# Altium PCB PCB2.PcbDoc
Units mil, origin at the board's own origin, x right, y up, seen from the top; angles counter-clockwise.
Board outline 1040 x 1325 mil, 2 copper layers (Top Layer, Bottom Layer); 6 components, 13 nets, 32 pads, 0 vias.
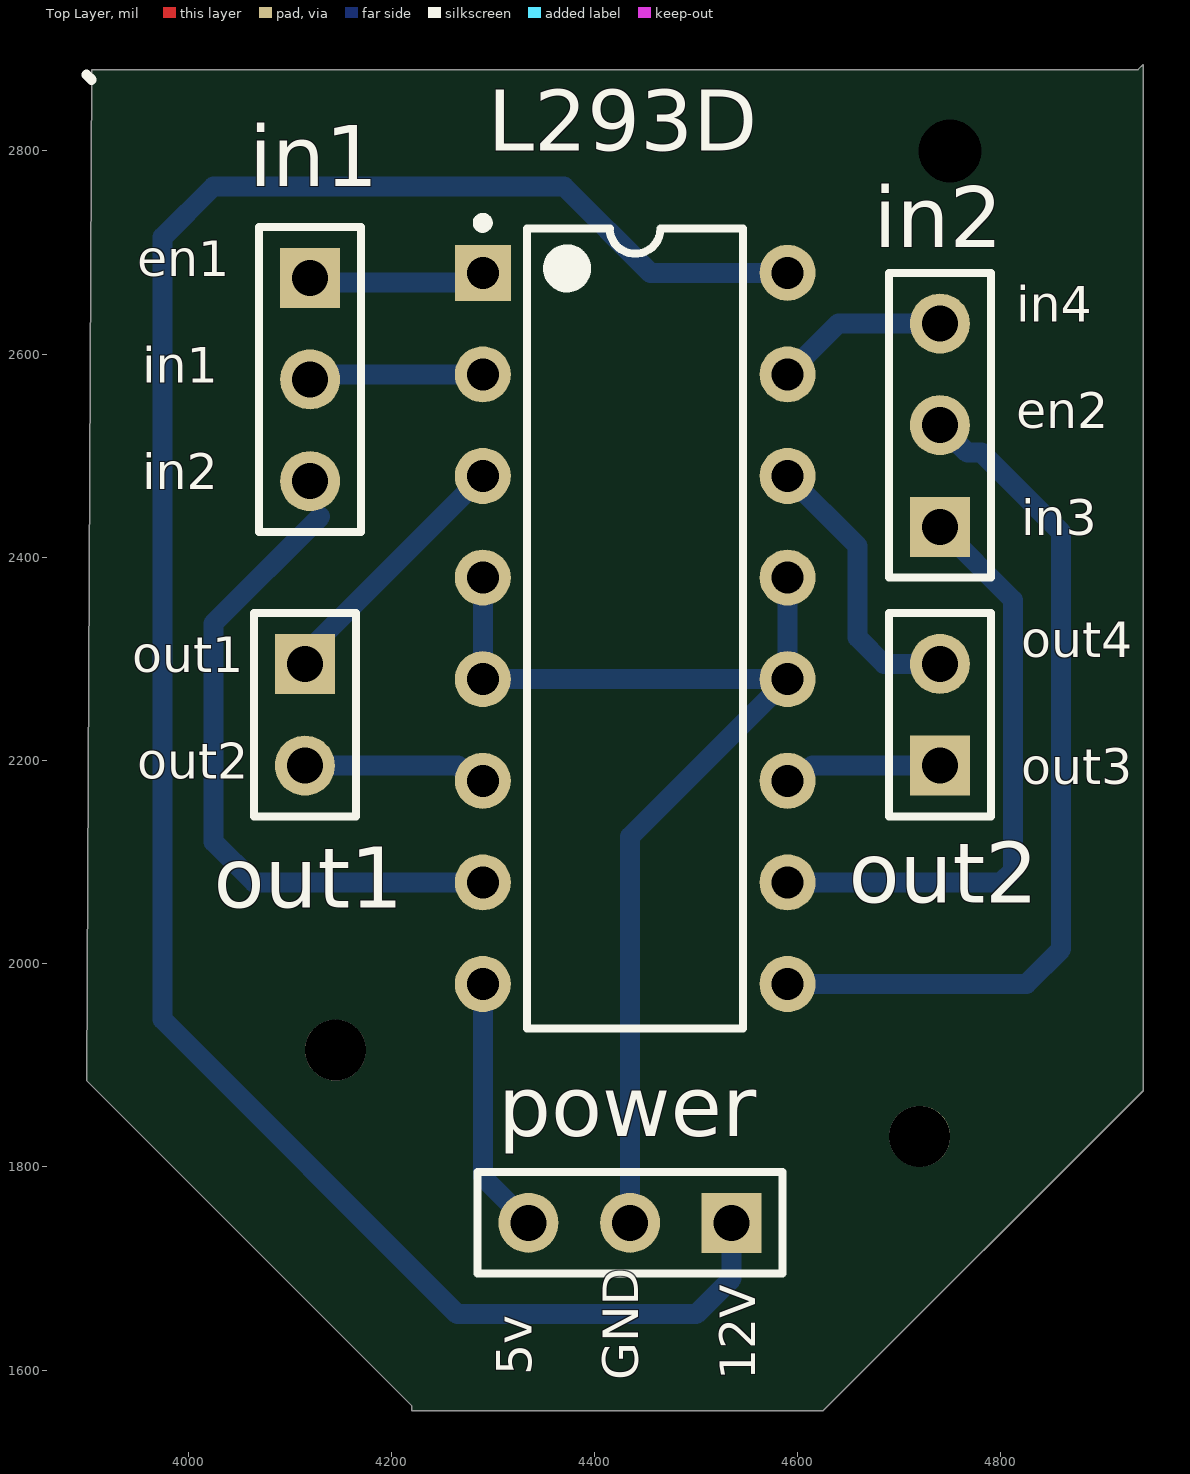
[diagram p0: Top Layer view]
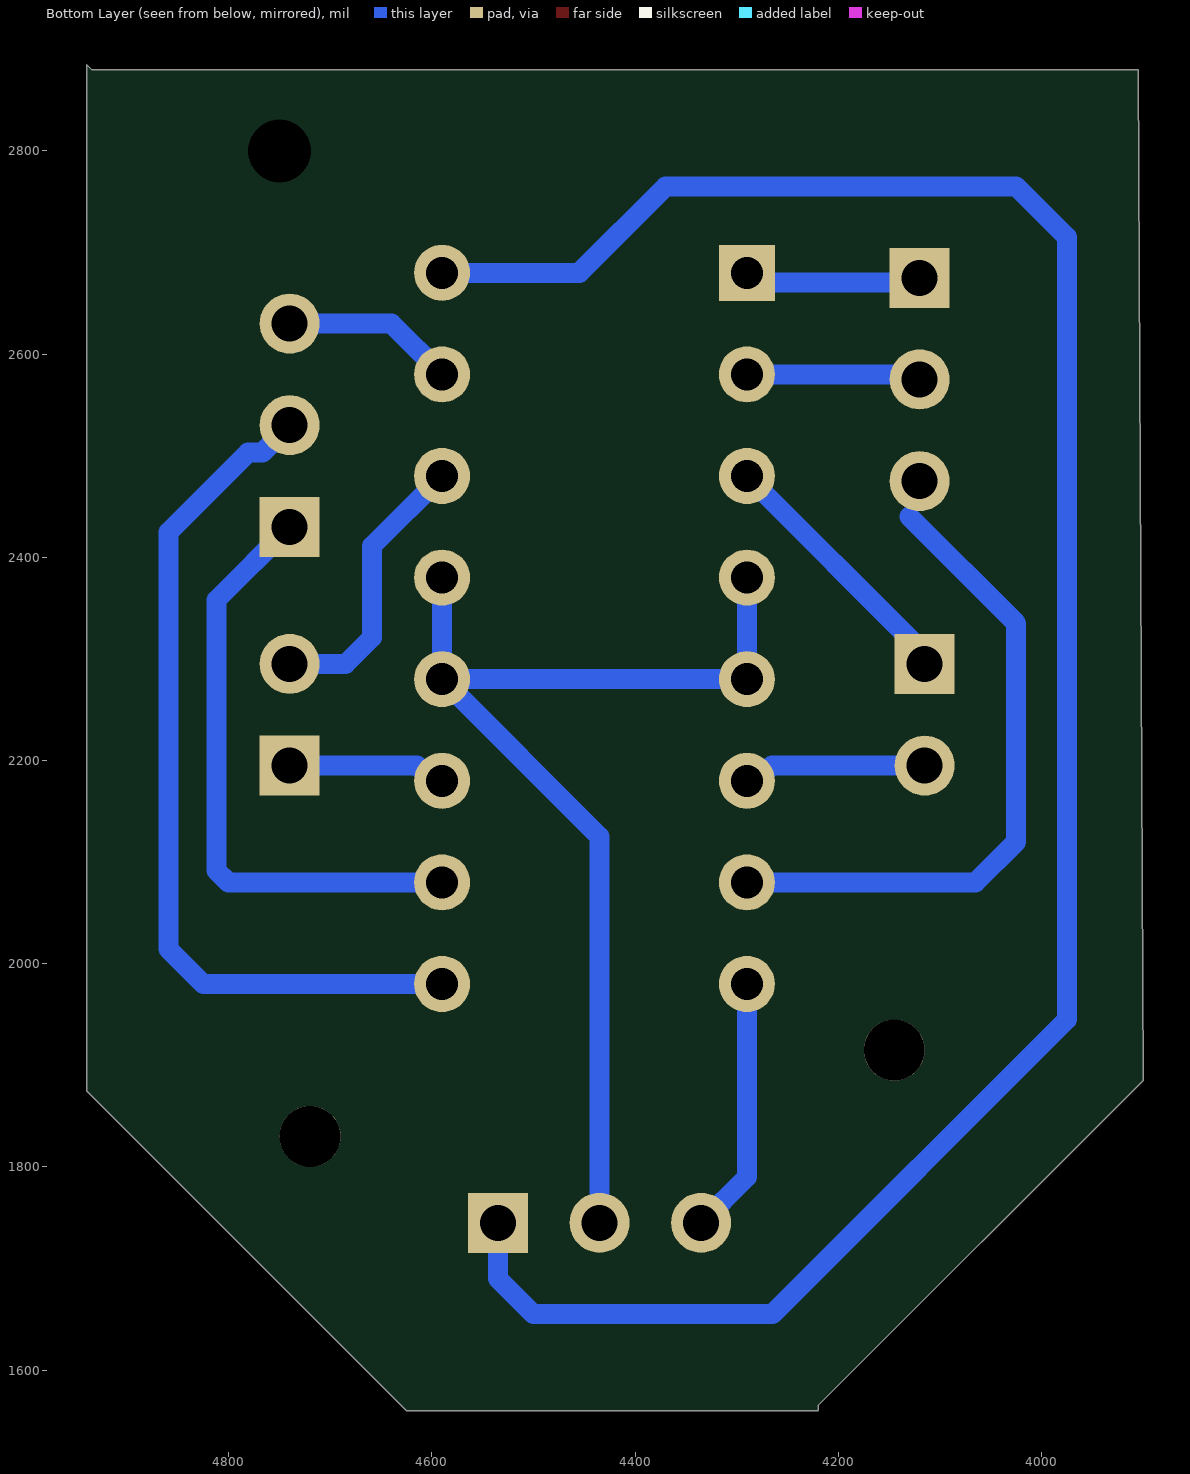
[diagram p1: Bottom Layer view, seen from below]

## Layer stack, top to bottom
Top Solder: solder mask 0.4, Solder Resist, Dk 3.5
Top Layer: signal copper 1.4
Dielectric 1: dielectric 12.6, FR-4, Dk 4.8
Bottom Layer: signal copper 1.4
Bottom Solder: solder mask 0.4, Solder Resist, Dk 3.5

## Board outline
3900,1885 4220,1565 4220,1560 4625,1560 4940,1875 4940,2885 4935,2880 3905,2880

## Design rules (kind name [scope] priority, off if disabled: settings)
Clearance [All] p1: gap=27.56 ignorepadtopadclearanceinfootprint=FALSE
PolygonConnect [All] p1: connectstyle=Relief reliefconductorwidth=10 reliefentries=4 polygonreliefangle="90 Angle" airgapwidth=10
RoutingLayers [All] p1: top layer_v5=FALSE bottom layer_v5=TRUE
RoutingVias [All] p1: holewidth=28 width=50 viastyle="Through Hole" minholewidth=28 minwidth=50 maxholewidth=28 maxwidth=50
SolderMaskExpansion [All] p1: expansion=4 istentingtop=FALSE
Width [All] p1: maxlimit=19.68 minlimit=19.68 preferedwidth=19.68
29 further rules are at their usual default settings.

## Components (designator, comment, footprint, x,y, rotation, side; value= is the part's Value field where it differs from the comment)
in1 "motor1" HDR1X3 4120,2675 r270 top (schematic designator "input motor1")
in2 "motor 2" HDR1X3 4740,2430 r90 top (schematic designator "input motor2")
L293D "L293D" STM-L293D-16 4440,2330 r0 top (schematic designator U?)
out1 "Header 2" HDR1X2 4115,2295 r270 top (schematic designator "motor 1 out put")
out2 "Header 2" HDR1X2 4740,2195 r90 top (schematic designator "motor 2 out put")
power "power" HDR1X3 4535,1745 r180 top

## Footprints (in the part's own frame and the unit in brackets; to place one, negate y for a bottom-side part, rotate by r counter-clockwise, add the part's x,y. Pads: shape width x height; smd on the part's side, far side on the other; paste and mask are expansions set on the pad)
HDR1X2 [mm] "Connector; Header; 2 Position"
  rect 1.5x1.5 hole 0.9: 1(0,0)
  round 1.5 hole 0.9: 2(2.54,0)
  silkscreen extent -1.27,-1.27 3.81,1.27
HDR1X3 [mm] "Connector; Header; 3 Position"
  rect 1.5x1.5 hole 0.9: 1(0,0)
  round 1.5 hole 0.9: 2(2.54,0) 3(5.08,0)
  silkscreen extent -1.27,-1.27 6.35,1.27
STM-L293D-16 [mm] "DIP, 16-Leads, Body 20x6.85mm, Pitch 2.54mm"
  rect 1.4x1.4 hole 0.8: 1(-3.81,8.89)
  round 1.4 hole 0.8: 2(-3.81,6.35) 3(-3.81,3.81) 4(-3.81,1.27) 5(-3.81,-1.27) 6(-3.81,-3.81) 7(-3.81,-6.35) 8(-3.81,-8.89) 9(3.81,-8.89) 10(3.81,-6.35) 11(3.81,-3.81) 12(3.81,-1.27) 13(3.81,1.27) 14(3.81,3.81) 15(3.81,6.35) 16(3.81,8.89)
  silkscreen extent -3.93,-10 2.7,10.26, body extent -3.93,-10 3.93,10, height 5.1

## Part data
in1 in2 power: library part "Header 3", "Header, 3-Pin", LatestRevisionDate=17-Jul-2002, LatestRevisionNote="Re-released for DXP Platform.", Publisher="Altium Limited"
L293D: library part CMP-2000-06524-1, "Push-Pull Four Channel Driver with Diode, 4.5 to 36 V, -40 to 150 degC, 16-Pin PDIP, RoHS, Tube", Current - Output / Channel=600mA, Current - Peak Output=1.2A, Manufacturer=STMicroelectronics, On-State Resistance=-, Operating Temperature=-40°C~150°C, Package / Case="16-DIP(0.300\",7.62mm)", Package Description="16-Pin Thru-Hole Dual-In-Line, Body 20 x 6.85 mm, Pitch 2.54 mm", Package Reference=DIP-16, Standard Package=25, Supplier Device Package=16-PowerDIP, Voltage - Supply=4.5V~36V, Category=IntegratedCircuits(ICs), Datasheet URL=http://www.st.com/st-web-ui/static/active/en/resource/technical/document/datasheet/CD00000059.pdf, Datasheet Version=07/2003, Dynamic Catalog=HalfBridge, Family=PMIC-MOSFET,BridgeDrivers-InternalSwitch, Input Type=Non-Inverting, Manufacturer URL=http://www.st.com/, Mounting Technology=ThroughHole, Mounting Type=ThroughHole, Number of Outputs=4, Other Names=497-2936-5, Other Related Documents=L293DViewAllSpecifications, Packaging=Tube, PartNumber=L293D, Series=-, Type=HalfBridge
out1 out2: "Header, 2-Pin", LatestRevisionDate=17-Jul-2002, LatestRevisionNote="Re-released for DXP Platform.", Publisher="Altium Limited"

## Free pads (board coordinates)
  round 60 hole 60: 1(4720,1830) 3(4145,1915)
  round 60 hole 62: 2(4750,2800)

## Nets (pads, with @x,y where several pads share a name; then routed paths per layer and width w, separated by ;. In a path a pad name is that pad's centre, name@x,y a point inside that pad or via, vN(x,y) a via of type N, cw(c..) or ccw(c..) an arc to the next point about the centre after c; other vN are vias at no path point)
+5: L293D.8 power.3 | length 253.6
  Bottom Layer w19.68: L293D.8 4290,1790 power.3
+12: L293D.16 power.1 | length 2190.5
  Bottom Layer w19.68: power.1 4535,1690 4500,1655 4265,1655 3975,1945 3975,2715 4025,2765 4370,2765 4455,2680 L293D.16
"enable 2": in2.2 L293D.9 | length 856.8
  Bottom Layer w19.68: L293D.9 4825,1980 4859.25,2014.25 4859.25,2424.75 4781,2503 4767,2503 in2.2
enablr1: in1.1 L293D.1 | length 154
  Bottom Layer w19.68: in1.1@4140,2670.31 4280.31,2670.31 L293D.1
GND: L293D.4 L293D.5 L293D.12 L293D.13 power.2 | length 1099.2
  Bottom Layer w19.68: L293D.4 L293D.5 L293D.12 ; power.2 4435,2125 L293D.12 ; L293D.13 L293D.12
input1: in1.2 L293D.2 | length 170
  Bottom Layer w19.68: in1.2@4120,2580 L293D.2
input2: in1.3 L293D.7 | length 645.1
  Bottom Layer w19.68: 4130,2440 4025,2335 4025,2120 4065,2080 L293D.7
input3: in2.1 L293D.10 | length 595.1
  Bottom Layer w19.68: L293D.10 4800.47,2080 4812,2091.53 4812,2358 in2.1
input4: in2.3 L293D.15 | length 170.7
  Bottom Layer w19.68: L293D.15 4640,2630 in2.3
"output 1": L293D.3 out1.1 | length 270.4
  Bottom Layer w19.68: out1.1@4120,2280 4120,2310 L293D.3
"output 2": L293D.6 out1.2 | length 181.2
  Bottom Layer w19.68: out1.2 4265.41,2195 4280.41,2180 L293D.6
"output 3": L293D.11 out2.1 | length 156.2
  Bottom Layer w19.68: L293D.11 4599.59,2180 4614.59,2195 out2.1
"output 4": L293D.14 out2.2 | length 284.4
  Bottom Layer w19.68: L293D.14 4659,2411 4659,2321 4685,2295 out2.2@4745,2295

## Silkscreen, mask and mechanical layers (free items; w line width, h text height)
Top Overlay:
  lines w10: 3900,2875 3905,2870
  text "en1" at 3950,2665 h60
  text "in4" at 4815,2620 h60
  text "in1" at 3955,2560 h60
  text "en2" at 4815,2515 h60
  text "in2" at 3955,2455 h60
  text "in3" at 4820,2410 h60
  text "out4" at 4820,2290 h60
  text "out1" at 3945,2275 h60
  text "out2" at 3950,2170 h60
  text "out3" at 4820,2165 h60
  text "5v" at 4350,1595 h60 r90
  text "GND" at 4455,1590 h60 r90
  text "12V" at 4570,1590 h60 r90
Drill Drawing:
  lines w10: 4940,2875 3900,2875 3900,1880 4225,1555 4625,1555 4945,1875 4945,1895 4945,2880

## Dimensions
4945,2880 to 3905,2880 on Top Overlay
4935,2880 to 4625,1560 on Top Overlay